# EAGLE board Gimbal Controller Board (EAGLE 8.2.1)
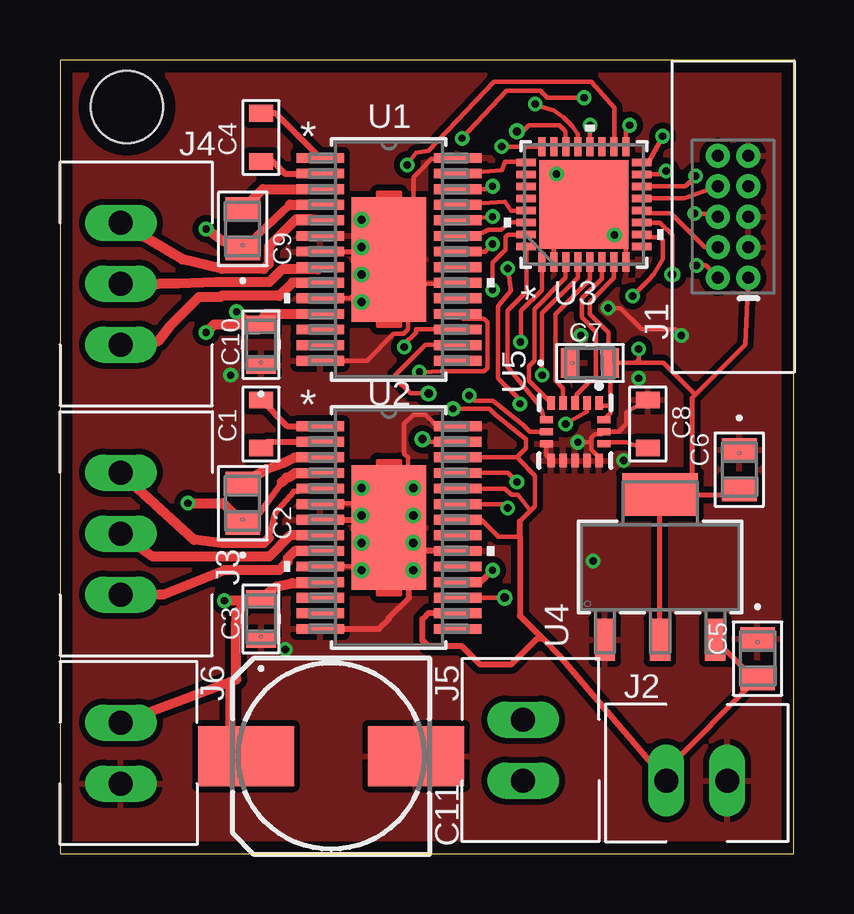
[diagram p0: board, top side]
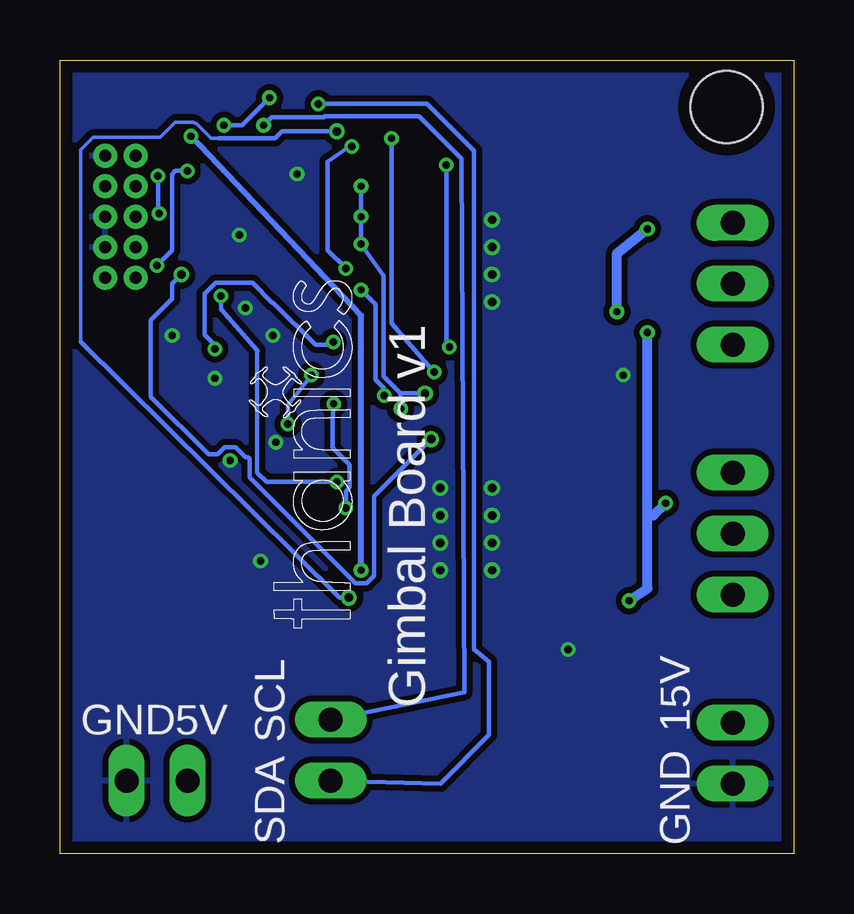
[diagram p1: board, bottom side, seen from below]

Size 30.59 x 33.07 mm. Coordinates in mm from the lower left corner, seen from the top.
Outline: 0,0 30.59,0 30.59,33.07 0,33.07 0,0
Copper layers (1*16): Top 0.035mm / dielectric 1.6mm / Bottom 0.035mm
Design rules "Elecrow_2-layer_PCB_eagle_rule": minimum track width 6mil, minimum drill 12mil, track to track 6mil, track to pad 6mil, pad to pad 6mil, via to via 8mil, smd to smd 0mil, copper to edge 20mil, drill to drill 10mil, minimum pad ring 6mil, minimum via ring 6mil, stop-mask expansion 0mil, vias tented up to drill 100mil, thermal gap 10mil
Holes 3 mm at 2.79,31.11

## Footprints (pad centres in the part's own frame; a part is rotated, then mirrored left to right if it is on the bottom)
0603_CAPACITOR = smd 0.701 x 1.001: 1 -1.001,0; 2 1.001,0
0805 = smd 0.965 x 1.448: 1 -0.826,0; 2 0.826,0
G-21 = smd 0.711 x 1.245: 1 -0.851,0; 2 0.851,0
0810_POLCAP = smd 4 x 2.5: + 3.55,0; - -3.55,0
2X5-PTH-1.27MM = drill 0.508 pad 1: 1 -2.54,-0.635; 2 -2.54,0.635; 3 -1.27,-0.635; 4 -1.27,0.635; 5 0,-0.635; 6 0,0.635; 7 1.27,-0.635; 8 1.27,0.635; 9 2.54,-0.635; 10 2.54,0.635
XH_CONNECTOR = drill 1.001 long: 1 -1.27,0; 2 1.27,0
JST-XH_3POS = drill 1 long: P$1 0,2.54; P$2 0,0; P$3 0,-2.54
PWP28_5P18X3P1-M = smd 1.981 x 0.406: 1 -2.87,4.225; 2 -2.87,3.575; 3 -2.87,2.925; 4 -2.87,2.275; 5 -2.87,1.625; 6 -2.87,0.975; 7 -2.87,0.325; 8 -2.87,-0.325; 9 -2.87,-0.975; 10 -2.87,-1.625; 11 -2.87,-2.275; 12 -2.87,-2.925; 13 -2.87,-3.575; 14 -2.87,-4.225; 15 2.87,-4.225; 16 2.87,-3.575; 17 2.87,-2.925; 18 2.87,-2.275; 19 2.87,-1.625; 20 2.87,-0.975; 21 2.87,-0.325; 22 2.87,0.325; 23 2.87,0.975; 24 2.87,1.625; 25 2.87,2.275; 26 2.87,2.925; 27 2.87,3.575; 28 2.87,4.225 | smd 3.1 x 5.18: 29 0,0
QFN-32_5X5X0.9 = smd 0.805 x 0.3: 1 -2.402,1.75; 2 -2.402,1.25; 3 -2.402,0.75; 4 -2.402,0.25; 5 -2.402,-0.25; 6 -2.402,-0.75; 7 -2.402,-1.25; 8 -2.402,-1.75; 17 2.402,-1.75; 18 2.402,-1.25; 19 2.402,-0.75; 20 2.402,-0.25; 21 2.402,0.25; 22 2.402,0.75; 23 2.402,1.25; 24 2.402,1.75 | smd 0.3 x 0.805: 9 -1.75,-2.402; 10 -1.25,-2.402; 11 -0.75,-2.402; 12 -0.25,-2.402; 13 0.25,-2.402; 14 0.75,-2.402; 15 1.25,-2.402; 16 1.75,-2.402; 25 1.75,2.402; 26 1.25,2.402; 27 0.75,2.402; 28 0.25,2.402; 29 -0.25,2.402; 30 -0.75,2.402; 31 -1.25,2.402; 32 -1.75,2.402 | smd 3.7 x 3.7: 33 0,0
SOT-223 = smd 0.851 x 1.761: 1 -2.3,-3.025; 2 0,-3.025; 3 2.3,-3.025 | smd 3.151 x 1.761: 4 0,3.025
LGA16R50P7X5_300X300X100 = smd 0.55 x 0.3: 1 -1.2,1; 2 -1.2,0.5; 3 -1.2,0; 4 -1.2,-0.5; 5 -1.2,-1; 9 1.2,-1; 10 1.2,-0.5; 11 1.2,0; 12 1.2,0.5; 13 1.2,1 | smd 0.3 x 0.55: 6 -0.5,-1.2; 7 0,-1.2; 8 0.5,-1.2; 14 0.5,1.2; 15 0,1.2; 16 -0.5,1.2

## Placement (x,y rotation side)
C1  10nF  [0603_CAPACITOR]  8.38,17.91 90 top
C2  0.1uF  [0805]  7.62,14.61 90 top
C3  10uF  [G-21]  8.38,9.78 90 top
C4  10nF  [0603_CAPACITOR]  8.38,29.84 90 top
C5  0.1uF  [0805]  29.08,8.13 270 top
C6  0.1uF  [0805]  28.32,16 270 top
C7  10uF  [G-21]  22.1,20.45 0 top
C8  10nF  [0603_CAPACITOR]  24.51,17.91 270 top
C9  0.1uF  [0805]  7.62,26.04 90 top
C10  10uF  [G-21]  8.38,21.21 90 top
C11  100uF  [0810_POLCAP]  11.3,4.06 180 top
J1  CORTEX_DEBUG_PTH  [2X5-PTH-1.27MM]  28.07,26.54 90 top
J2  POWER_CONNECTOR  [XH_CONNECTOR]  26.54,3.05 0 top
J3  BLDC_MOTOR_CONNECTOR  [JST-XH_3POS]  2.54,13.33 0 top
J4  BLDC_MOTOR_CONNECTOR  [JST-XH_3POS]  2.54,23.75 0 top
J5  I2C_CONNECTOR  [XH_CONNECTOR]  19.3,4.32 270 top
J6  GIMBAL_POWER_CONNECTOR  [XH_CONNECTOR]  2.54,4.19 270 top
U1  DRV8313  [PWP28_5P18X3P1-M]  13.72,13.59 0 top
U2  DRV8313  [PWP28_5P18X3P1-M]  13.72,24.77 0 top
U3  MKV30F64VFM10  [QFN-32_5X5X0.9]  21.84,27.05 90 top
U4  AP2114H-3.3TRG1  [SOT-223]  25.02,11.94 0 top
U5  L3GD20H  [LGA16R50P7X5_300X300X100]  21.48,17.58 270 top

## Library data of the parts
C1 C4 C8 C11 J2-J6 = thanics_robotics
C2 C5 C6 C9 = 0.1uF X7R Ceramic Capacitor; COPYRIGHT: Copyright C 2015 Accelerated Designs. All rights reserved; MANUFACTURER_PART_NUMBER: 08055C104KAT2A; VENDOR: Vendor
C3 C7 C10 = 10uF X5R Ceramic Capacitor; COPYRIGHT: Copyright C 2015 Accelerated Designs. All rights reserved; MANUFACTURER_PART_NUMBER: GRM21BR60J106ME19L; VENDOR: Vendor
J1 = SparkFun-Connectors
U1 U2 = DRV8313_BLDC_Driver; MANUFACTURER_PART_NUMBER: drv8313pwp; VENDOR: TEXAS INSTRUMENTS
U3 = ARM-cortex-m4-kinetis-vseries; CPU: ARM Cortex-M4F; FLASHKB: 64; MANUFACTURER_PART_NUMBER: mkv30f64vfm10; MAXFREQUENCY: 100; PINCOUNT: 32; SRAMKB: 16; VENDOR: FREESCALE
U4 = 3.3V regulator; MANUFACTURER_PART_NUMBER: ap2114h3.3trg1; VENDOR: DIODESINC_2
U5 = L3GD20H; AVAILABILITY: Unavailable; DESCRIPTION: MEMS motion sensor: 3-axis digital output gyroscope; MF: STMicroelectronics; MP: L3GD20H; PACKAGE: LGA-16 STMicroelectronics; PRICE: 5.00 USD

## Nets
+3V3: C6.2 C7.2 J1.1 U3.1 U3.7 U4.2 U4.4 U5.1 U5.16
+5V: C5.2 J2.1 U1.16 U1.22 U1.24 U1.26 U2.16 U2.22 U2.24 U2.26 U4.3
+15V: C2.1 C3.2 C9.1 C10.2 C11.+ J6.1 U1.4 U1.11 U2.4 U2.11
GND: C3.1 C5.1 C6.1 C7.1 C8.1 C10.1 C11.- J1.3 J1.5 J1.9 J2.2 J6.2 U1.6 U1.7 U1.10 U1.14 U1.20 U1.28 U1.29 U2.6 U2.7 U2.10 U2.14 U2.20 U2.28 U2.29 U3.2 U3.8 U3.33 U4.1 U5.8 U5.9 U5.10 U5.11 U5.12 U5.13 U5.15
N$1: C1.1 U1.2
N$2: C1.2 U1.1
N$3: U1.25 U3.10
N$4: U1.17 U3.22
N$5: J3.P$1 U1.5
N$6: U1.23 U3.24
N$7: U1.18 U3.16
N$8: U1.27 U3.11
N$9: J1.4 U3.12
N$10: J1.6 U3.14
N$11: J1.8 U3.13
N$12: J1.2 U3.15
N$13: J3.P$2 U1.8
N$14: J3.P$3 U1.9
N$15: J5.1 U3.20
N$16: J5.2 U3.21
N$17: U3.3 U5.5
N$18: U3.4 U5.2
N$19: U3.5 U5.4
N$20: U3.6 U5.3
N$21: C8.2 U5.14
N$22: C2.2 U1.3
N$23: C4.1 U2.2
N$24: C4.2 U2.1
N$25: U3.32 U5.6
N$26: U3.31 U5.7
N$27: U2.25 U3.29
N$28: U2.27 U3.25
N$29: U2.23 U3.30
N$30: U2.18 U3.17
N$31: U2.17 U3.18
N$32: J4.P$1 U2.5
N$33: J4.P$2 U2.8
N$34: J4.P$3 U2.9
N$35: C9.2 U2.3

## Tracks (layer width: path | path; a pad name or v marks a point on that pad's centre or on a via)
+3V3  (via drill 0.3)
  Top 0.178: 26.48,19.11 26.35,18.99 | U5.16 22.95,18.36 22.95,18.67 | C7.2 22.95,18.67 | U5.1 22.59,18.67 22.95,18.67 | 24,20.45 C7.2 | 24,20.45 25.15,20.45 26.48,19.11 | U3.7 23.09,23.99 22.31,23.21 22.31,23.2 22.1,22.99 22.1,22.48 22.86,21.72 22.86,20.54 C7.2 | v24.13,21.03 24.13,20.57 24,20.45 | v19.2,21.32 19.23,21.6 19.23,22.62 20.09,23.48 U3.1 | 26.48,19.11 28.57,21.21 J1.1
  Top 0.203: 26.42,14.96 U4.4 U4.2 | 26.42,14.96 28.11,14.96 C6.2 | 26.35,18.99 26.35,15.03 26.42,14.96
  Bottom 0.178: v24.13,21.03 24.06,21.1 24.23,21.3 24.55,21.62 24.55,23.34 24.1,23.79 22.56,23.79 21.74,22.97 21.7,22.97 19.94,21.21 19.3,21.21 v19.2,21.32
+5V  (via drill 0.3, 0.35)
  Top 0.178: U2.26 18.03,27.69 v18.03,27.81 | 19.11,16.57 19.43,16.89 19.43,17.27 18.16,18.29 17.91,18.54 v16.38,18.54 | 19.11,16.57 19.05,16.51 U1.26 | U2.22 17.71,25.09 v18.03,25.4 | 19.11,16.57 19.11,16.45 19.81,15.75 19.81,14.48 19.62,14.29 | 19.62,14.29 19.18,13.84 | U1.24 18.56,15.21 18.82,14.95 19.09,14.95 19.62,14.29 | U1.22 17.58,13.91 18.29,13.21 19.18,13.21 | U2.24 16.61,26.42 v18.03,26.54 | v15.37,19.18 14.61,19.18 13.97,19.81 13.97,19.94 15.24,21.21 16.57,21.21 U2.16
  Top 0.203: J2.1 25.27,3.49 C5.2 28.93,7.3 U4.3
  Top 0.254: J2.1 20.83,8.26 20.13,8.95 | 20.13,8.95 19.18,9.91 19.18,13.21 19.18,13.84 | 16.66,13.84 U1.22 | 20.13,8.95 19.88,8.95 18.8,7.87 17.53,7.87 16.76,8.64 15.37,8.64 15.11,8.89 15.11,9.78 15.37,10.03 16.57,10.03 U1.16
  Bottom 0.178: v18.03,27.81 v18.03,26.54 v18.03,25.4 17.09,24.08 17.09,19.89 16.38,19.18 | 16.38,19.18 v16.38,18.54 | 16.38,19.18 v15.37,19.18
+15V  (via drill 0.3)
  Top 0.254: C3.2 7.71,10.54 | C10.2 7.89,22.06 | 8.16,13.96 9.26,15.48 | C2.1 7.87,13.83 | 9.44,15.67 9.49,15.67 | U1.4
  Top 0.33: C9.1 9.58,27.04
  Top 0.406: U1.11 10.8,11.27 9.69,11.27 9.04,11.14 C3.2 7.96,10.63 7.37,10.03 7.37,9.46 7.35,9.71 7.35,7.25 7.1,7.16 | J6.1 7.1,7.16 | 9.58,27.04 U2.4 | U2.11 8.56,22.49 C10.2 6.44,22.06 v6.1,21.72 | 7.71,10.54 v6.86,10.54 | 7.89,22.06 v7.37,22.58 | v6.1,26.04 6.79,25.53 C9.1 | v5.33,14.61 6.79,14.61 C2.1 | 7.87,13.83 8.16,13.96 | 9.49,15.67 9.8,15.85 U1.4 | 9.26,15.48 9.44,15.67 | 7.1,7.16 7.1,4.72 C11.+
  Bottom 0.406: v6.86,10.54 6.1,11.05 6.1,14.1 | 6.1,14.1 v6.1,21.72 | v7.37,22.58 7.37,25.02 v6.1,26.04 | 6.1,14.1 5.84,14.1 v5.33,14.61
GND  (via drill 0.3, 0.35)
  Top 0.178: U2.7 12.88,25.09 12.95,25.02 13.46,25.02 U2.29 | U2.14 12.79,20.54 13.91,21.66 14.32,21.66 14.51,21.84 14.51,22.31 13.72,23.1 13.72,24 | 13.72,24 U2.29 | U2.10 12.09,23.14 U2.29 | U3.8 23.59,25.75 23.6,26.02 23.13,26.02 22.1,27.05 U3.33 | C8.1 23.62,18.4 23.62,17.91 23.3,17.58 U5.15 22.57,17.47 22.3,17.47 22.16,17.33 22.16,17.14 | U5.8 20.28,16.58 U5.9 | 22.16,17.14 22.16,16.83 22.48,16.52 U5.13 | U3.2 20.59,25.8 U3.33 | U3.33 21.84,27.18 v20.7,28.32 | U2.28 16.55,28.96 15.49,28.96 15.02,28.49 15.02,28.48 14.73,28.18 14.73,26.42 13.72,25.4 U2.29 | U2.20 16.55,23.75 15.11,23.75 14.86,24 13.72,24 | U1.10 10.86,11.98 13.72,11.98 | U1.6 10.89,14.61 13.08,14.61 13.53,14.16 13.53,13.78 | v21.59,17.14 22.16,17.14 | 14.55,10.79 14.55,11.63 v14.73,11.81 | U1.28 15.71,17.81 15.24,18.29 14.73,18.29 14.35,17.91 14.35,16.67 14.51,16.51 14.51,15.46 v14.73,15.24 | v22.86,22.73 23.37,22.73 24.26,21.84 25.65,21.84 v25.91,21.59 | U3.33 v23.11,25.78
  Top 0.254: U1.7 13.14,13.91 13.21,13.84 13.46,13.84 13.53,13.78 U1.29 13.72,12.57 | U1.14 13.3,9.36 13.72,9.78 13.72,9.82 14.55,10.65 14.55,10.79 14.55,11.15 13.72,11.98 13.72,12.57 | U1.20 13.76,12.61 13.72,12.57
  other vias: 21.72,21.59 22.23,12.19 23.5,16.38 7.11,19.94 9.4,8.51 24.13,19.81 12.57,26.42 12.57,25.27 12.57,24.13 12.57,22.99 12.57,15.24 12.57,14.1 12.57,12.95 12.57,11.81 14.73,14.1 14.73,12.95
  pour Top (isolate 0.254): 0,33.02 30.61,33.02 30.61,0 0,0
  pour Bottom (isolate 0.254): 0,33.02 30.61,33.15 30.61,0.13 0,0
N$1
  Top 0.254: C1.1 8.64,17.16 U1.2
N$2
  Top 0.254: C1.2 9.48,17.81 U1.1
N$3  (via drill 0.3)
  Top 0.178: v23.88,23.24 24.5,23.86 24.75,24.15 25.14,24.8 25.14,25.55 25,25.69 24.36,25.69 U3.10 | v19.05,15.49 18.67,15.88 16.6,15.88 U1.25
  Bottom 0.178: v23.88,23.24 23.88,22.69 22.37,20.98 22.36,20.98 22.36,20.96 22.36,20.92 22.36,15.88 21.97,15.49 v19.05,15.49
N$4  (via drill 0.35)
  Top 0.178: U1.17 v18.54,10.66 v18.54,10.67 | U3.22 21.08,29.46 21.08,30.1 20.83,30.35 19.56,30.35 19.3,30.1 v19.05,30.1
  Bottom 0.152: 23.98,29.81 24.29,29.81 24.91,30.43 24.97,30.43 25.02,30.48 25.78,30.48 26.42,29.84 29.21,29.84 29.72,29.34 29.72,21.34
  Bottom 0.178: v18.54,10.67 18.92,10.67 29.72,21.34 | v19.05,30.1 21.33,30.1 21.62,29.81 23.98,29.81
N$5
  Top 0.254: U1.5 9.75,15.09 8.95,14.16 8.7,13.15
  Top 0.406: 8.7,13.15 8.49,12.94 6.75,12.94 5.59,13.08 J3.P$1
N$6  (via drill 0.3)
  Top 0.178: U1.23 18.51,14.56 v18.67,14.4 | v19.18,18.75 19.05,19.04 18.27,19.82 18.27,22.81 18.8,23.47 v18.67,24.38 | v18.41,29.46 20.08,29.46 U3.24
  Bottom 0.178: v18.67,14.4 18.67,15.1 18.5,15.27 18.5,16.21 19.21,16.92 19.21,18.02 v19.18,18.75 | v18.41,29.46 18.54,29.46 19.43,28.83 19.43,25.15 v18.67,24.38
N$7  (via drill 0.3)
  Top 0.178: v25.13,29.9 24.58,28.88 U3.16
  Top 0.254: U1.18 17.54,11.31 v18.03,11.81
  Bottom 0.254: v18.03,11.81 18.03,22.42 v25.13,29.9
N$8  (via drill 0.35)
  Top 0.178: U1.27 15.22,17.16 v15.11,17.27 | v25.53,24.13 25.53,25.78 25.02,26.29 24.26,26.29 U3.11
  Bottom 0.178: v15.11,17.27 17.49,14.9 17.49,11.58 17.81,11.27 18.26,11.27 22.69,15.69 22.69,16.47 22.73,16.51 22.85,16.51 23.27,16.93 23.72,16.93 24.01,16.64 24.38,16.64 26.8,19.05 26.8,22.23 25.91,23.11 25.91,23.75 v25.53,24.13
N$9
  Top 0.178: U3.12 24.36,26.69 25.46,26.69 26.88,25.27 J1.4
N$10  (via drill 0.3)
  Top 0.178: J1.6 27.3,26.67 v26.45,26.67 | v26.5,28.24 26.07,27.8 U3.14
  Bottom 0.178: v26.45,26.67 26.5,26.72 v26.5,28.24
N$11
  Top 0.178: J1.8 26.03,27.3 U3.13
N$12  (via drill 0.3)
  Top 0.178: J1.2 26.92,24.51 v26.54,24.51 | v25.27,28.45 25.13,28.3 U3.15
  Bottom 0.178: v26.54,24.51 25.91,25.15 25.91,28.32 25.78,28.45 v25.27,28.45
N$13
  Top 0.406: U1.8 9.6,13.26 8.72,12.38 3.87,12.38 J3.P$2
N$14
  Top 0.406: U1.9 9.8,12.61 9.5,12.31 9.5,12.17 9.14,11.81 6.86,11.81 4.32,10.79 J3.P$3
N$15  (via drill 0.3)
  Top 0.178: v22.1,30.35 U3.20
  Bottom 0.178: J5.1 13.72,6.73 13.84,28.96 15.62,30.73 19.55,30.73 19.59,30.7 21.76,30.7 v22.1,30.35
N$16  (via drill 0.3)
  Top 0.178: v19.81,31.24 20.06,31.11 20.57,30.99 20.98,30.7 21.37,30.32 21.59,29.97 U3.21
  Bottom 0.178: J5.2 14.73,2.92 12.7,4.95 12.7,8 13.34,8.51 13.34,29.3 15.28,31.24 v19.81,31.24
N$17
  Top 0.178: U5.5 20.48,18.79 19.56,19.71 19.56,20.32 19.77,20.54 19.77,22.7 21.08,24 21.08,24.64 U3.3
N$18  (via drill 0.3)
  Top 0.178: U5.2 21.98,18.42 v21.08,17.91 | v20.1,19.94 20.1,22.52 21.59,24 U3.4
  Bottom 0.178: v21.08,17.91 21.08,18.71 v20.1,19.94
N$19
  Top 0.178: U3.5 22.09,23.93 20.65,22.48 20.65,19.73 20.98,19.4 U5.4
N$20
  Top 0.178: U3.6 22.59,23.96 21.77,23.13 21.77,22.34 22.35,21.76 22.35,19.68 22.1,19.68 21.54,19.13 21.54,18.82 U5.3 21.49,18.79
N$21
  Top 0.178: U5.14 22.74,17.14 23.62,17.14 23.89,17.03 C8.2
N$22
  Top 0.406: C2.2 8.59,16.02 9.29,16.28 9.78,16.51 U1.3
N$23
  Top 0.254: U2.2 10.83,28.32 9.4,28.32 8.88,28.84 C4.1
N$24
  Top 0.254: U2.1 8.99,30.85 C4.2
N$25
  Top 0.178: U5.6 20.15,18.22 20.09,18.41 19.96,18.72 18.65,20.28 18.65,22.63 19.44,23.42 U3.32
N$26  (via drill 0.3)
  Top 0.178: U5.7 19.59,17.58 19.31,17.86 18.04,18.87 17.28,18.87 v17.07,19.09 | v18.03,23.5 18.03,24.63 18.58,25.17 18.58,25.69 18.67,25.78 19.42,25.78 U3.31
  Bottom 0.178: v17.07,19.09 17.07,19.39 17.42,19.75 17.42,22.89 v18.03,23.5
N$27
  Top 0.178: U2.25 18.55,27.17 18.8,26.8 U3.29
N$28
  Top 0.178: U2.27 18.43,28.47 18.54,28.83 19.67,28.83 U3.25
N$29
  Top 0.178: U2.23 17.61,25.87 17.87,26 18.39,26 18.82,26.3 U3.30 19.43,26.29
N$30  (via drill 0.3)
  Top 0.178: U2.18 16.79,22.28 17.68,22.28 17.82,22.14 17.82,20.24 17.68,20.09 15.88,20.09 15.51,20.08 v14.99,20.07 | v21.85,31.5 20.33,31.5 20.04,31.79 18.62,31.79 v16.76,29.81 | v23.75,30.35 23.59,30.2 U3.17
  Bottom 0.178: v14.99,20.07 16.76,22.1 v16.76,29.81 | v21.85,31.5 22.99,30.35 v23.75,30.35
N$31  (via drill 0.3)
  Top 0.178: U2.17 14.84,21.84 14.84,21.71 14.35,21.22 v14.35,21.11 | v14.48,28.7 14.85,29.2 15.35,29.29 18.1,32.17 22.15,32.17 23.11,31.08 23.11,29.43 U3.18
  Bottom 0.178: v14.35,21.11 14.48,21.24 v14.48,28.7
N$32
  Top 0.406: U2.5 10.5,26.43 9.84,26.43 8.7,25.29 8.7,24.58 8.49,24.37 6.75,24.37 5.08,24.77 J4.P$1
N$33
  Top 0.406: U2.8 10.75,24.35 9.26,24.35 8.72,23.81 6.52,23.81 4.93,23.75 4.19,23.75 3.56,23.62 J4.P$2
N$34
  Top 0.406: U2.9 9.69,23.79 9.14,23.24 6.74,23.24 6.68,23.19 5.79,23.19 4.57,21.97 4.06,21.34 J4.P$3
N$35
  Top 0.406: C9.2 8.45,27.69 U2.3

## Text on the board
tPlace: U1 | J4 | U3 | U5 | U2 | J3 | U4 | J2 | J6 | J5 | C11
bNames: 15V | SCL | Gimbal Board v1 | GND | 5V | GND | SDA